# EAGLE board CPB_2x12_Breakout_noFrame (EAGLE 9.6.2)
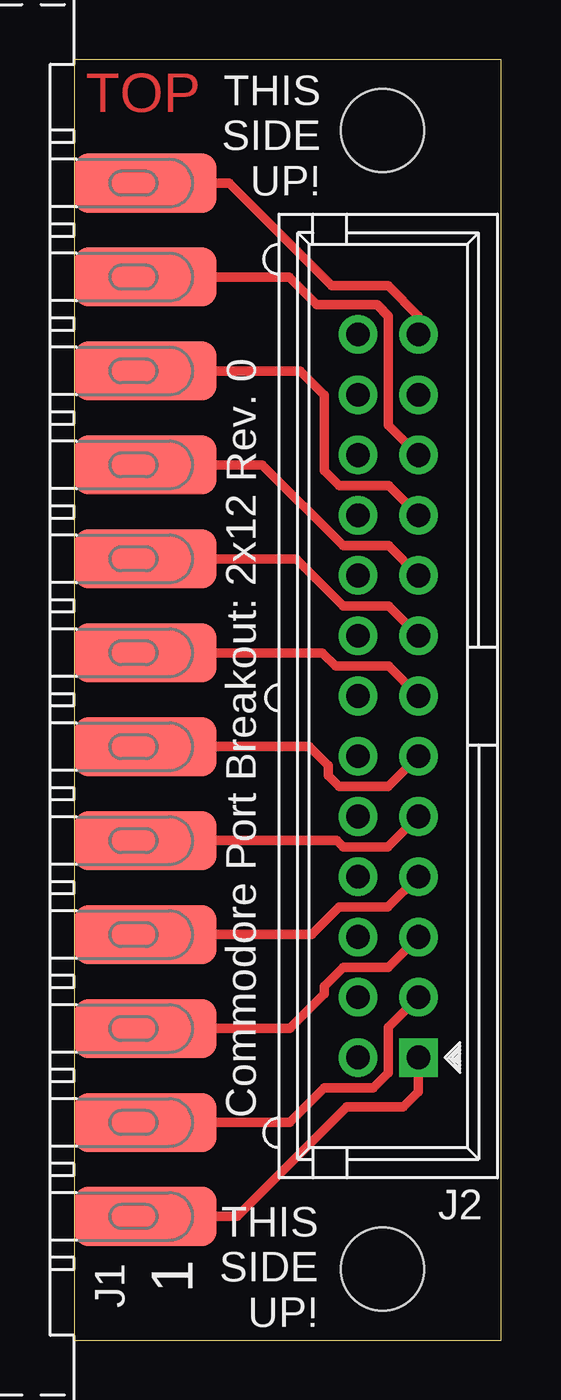
[diagram p0: board, top side]
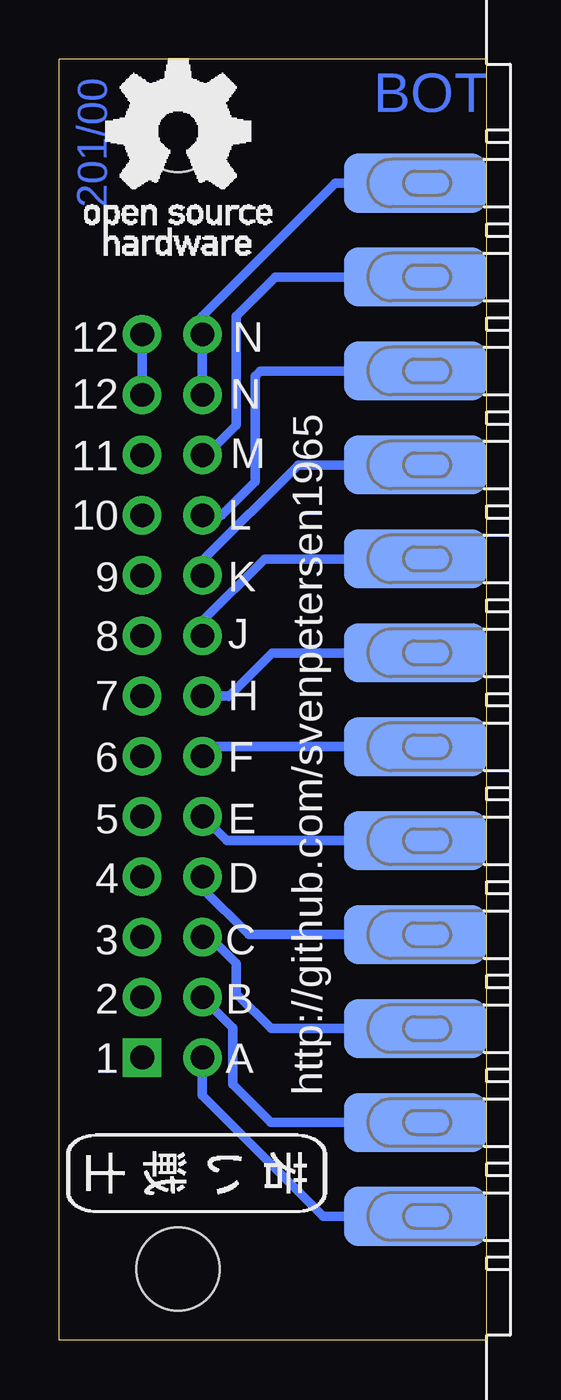
[diagram p1: board, bottom side, seen from below]

Size 18 x 54 mm. Coordinates in mm from the lower left corner, seen from the top.
Outline: 0,0 18,0 18,54 0,54 0,0
Copper layers (1*16): Top 0.035mm / dielectric 1.5mm / Bottom 0.035mm
Design rules "default *": minimum track width 6mil, minimum drill 0.35mm, track to track 6mil, track to pad 6mil, pad to pad 6mil, via to via 6mil, smd to smd 6mil, copper to edge 40mil, drill to drill 6mil, minimum pad ring 10mil, minimum via ring 8mil, stop-mask expansion 4mil, vias tented up to drill 25mil, thermal gap 10mil
Holes 3.5 mm at 13,3 13,51

## Footprints (pad centres in the part's own frame; a part is rotated, then mirrored left to right if it is on the bottom)
2X12_PORT = smd 2.5 x 6: 1 -21.78,-3; 2 -17.82,-3; 3 -13.86,-3; 4 -9.9,-3; 5 -5.94,-3; 6 -1.98,-3; 7 1.98,-3; 8 5.94,-3; 9 9.9,-3; 10 13.86,-3; 11 17.82,-3; 12 21.78,-3 | smd 2.5 x 6 bottom: A -21.78,-3; B -17.82,-3; C -13.86,-3; D -9.9,-3; E -5.94,-3; F -1.98,-3; H 1.98,-3; J 5.94,-3; K 9.9,-3; L 13.86,-3; M 17.82,-3; N 21.78,-3
2X13WV = drill 1 pad 1.626 square: 1 -15.24,-1.27 | drill 1 pad 1.626: 2 -15.24,1.27; 3 -12.7,-1.27; 4 -12.7,1.27; 5 -10.16,-1.27; 6 -10.16,1.27; 7 -7.62,-1.27; 8 -7.62,1.27; 9 -5.08,-1.27; 10 -5.08,1.27; 11 -2.54,-1.27; 12 -2.54,1.27; 13 0,-1.27; 14 0,1.27; 15 2.54,-1.27; 16 2.54,1.27; 17 5.08,-1.27; 18 5.08,1.27; 19 7.62,-1.27; 20 7.62,1.27; 21 10.16,-1.27; 22 10.16,1.27; 23 12.7,-1.27; 24 12.7,1.27; 25 15.24,-1.27; 26 15.24,1.27

## Placement (x,y rotation side)
J1  2X12_PORT  [2X12_PORT]  0,27 90 top
J2  [2X13WV]  13.24,27.16 90 top
U$9  OPEN_SOURCE_HW  [OPENHW]  16.93,45.75 0 bottom
U$10  [2LAYER]  0.48,51.77 0 top
U$11  [SVEN_TAG]  12.1,7 270 bottom

## Library data of the parts
J1 = Commodore
J2 = PINHEAD
U$9 U$11 = Logo
U$10 = I-TEILE

## Nets
PIN1: J1.1 J2.1
PIN2: J1.2 J2.3
PIN3: J1.3 J2.5
PIN4: J1.4 J2.7
PIN5: J1.5 J2.9
PIN6: J1.6 J2.11
PIN7: J1.7 J2.13
PIN8: J1.8 J2.15
PIN9: J1.9 J2.17
PIN10: J1.10 J2.19
PIN11: J1.11 J2.21
PIN12: J1.12 J2.23 J2.25
PINA: J1.A J2.2
PINB: J1.B J2.4
PINC: J1.C J2.6
PIND: J1.D J2.8
PINE: J1.E J2.10
PINF: J1.F J2.12
PINH: J1.H J2.14
PINJ: J1.J J2.16
PINK: J1.K J2.18
PINL: J1.L J2.20
PINM: J1.M J2.22
PINN: J1.N J2.24 J2.26

## Tracks (layer width: path | path; a pad name or v marks a point on that pad's centre or on a via)
PIN1
  Top 0.406: J1.1 6.87,5.22 11.49,9.84 13.88,9.84 14.51,10.47 J2.1
PIN2
  Top 0.406: J1.2 9.09,9.18 10.54,10.64 12.61,10.64 13.24,11.27 13.24,13.19 J2.3
PIN3
  Top 0.406: J1.3 9.08,13.14 10.54,14.61 10.54,14.92 11.34,15.72 13.24,15.72 14.51,16.98 J2.5
PIN4
  Top 0.406: J1.4 10.02,17.1 11.18,18.26 13.22,18.26 J2.7
PIN5
  Top 0.406: J1.5 11.07,21.06 11.34,20.8 13.22,20.8 J2.9
PIN6
  Top 0.406: J1.6 9.91,25.02 10.7,24.23 10.7,23.81 11.18,23.34 13.24,23.34 14.51,24.6 J2.11
PIN7
  Top 0.406: J1.7 10.45,28.98 11.02,28.42 13.25,28.42 J2.13
PIN8
  Top 0.406: J1.8 9.35,32.94 11.34,30.96 13.25,30.96 J2.15
PIN9
  Top 0.406: J1.9 7.93,36.9 11.34,33.5 13.25,33.5 J2.17
PIN10
  Top 0.406: J1.10 9.53,40.86 10.54,39.85 10.54,36.67 11.18,36.04 13.25,36.04 J2.19
PIN11
  Top 0.406: J1.11 9.06,44.82 10.22,43.66 12.76,43.66 13.24,43.18 13.24,38.59 J2.21
PIN12
  Top 0.406: J1.12 6.53,48.78 10.86,44.45 13.24,44.45 14.51,43.18 J2.25
  Bottom 0.406: J2.25 J2.23
PINA
  Bottom 0.406: J1.A 6.87,5.22 11.97,10.32 J2.2
PINB
  Bottom 0.406: J1.B 9.09,9.18 10.7,10.79 10.7,13.18 11.97,14.44 J2.4
PINC
  Bottom 0.406: J1.C 9.08,13.14 10.54,14.61 10.54,15.88 11.66,17 J2.6
PIND
  Bottom 0.406: J1.D 10.02,17.1 11.97,19.05 J2.8
PINE
  Bottom 0.406: J1.E 10.95,21.06 J2.10
PINF
  Bottom 0.406: J1.F 11.57,25.02 J2.12
PINH
  Bottom 0.406: J2.14 10.87,27.16 10.86,27.15 9.03,28.98 J1.H
PINJ
  Bottom 0.406: J1.J 9.35,32.94 11.97,30.32 J2.16
PINK
  Bottom 0.406: J1.K 7.93,36.9 11.97,32.86 J2.18
PINL
  Bottom 0.406: J1.L 9.53,40.86 9.75,40.64 9.75,36.2 11.16,34.78 J2.20
PINM
  Bottom 0.406: J1.M 8.9,44.82 10.54,43.18 10.54,38.58 11.8,37.32 J2.22
PINN
  Bottom 0.406: J1.N 6.37,48.78 11.97,43.18 J2.26 J2.24

## Text on the board
Bottom: 201/00
tPlace: THIS / SIDE / UP! | Commodore Port Breakout: 2x12 Rev. 0 | THIS / SIDE / UP! | 1
bPlace: N | 12 | N | 12 | M | 11 | L | 10 | K | 9 | J | 8 | H | 7 | F | 6 | E | 5 | D | 4 | C | 3 | B | 2 | A | 1 | http://github.com/svenpetersen1965